# Altium PCB RadioFEM.PcbDoc
Units mil, origin at the board's own origin, x right, y up, seen from the top; angles counter-clockwise.
Board outline 1968.5 x 965 mil, 4 copper layers (Top Layer, Internal Plane 1, Signal Layer 1, Bottom Layer), stack 64.634 mil thick; 104 components, 61 nets, 283 pads, 243 vias.
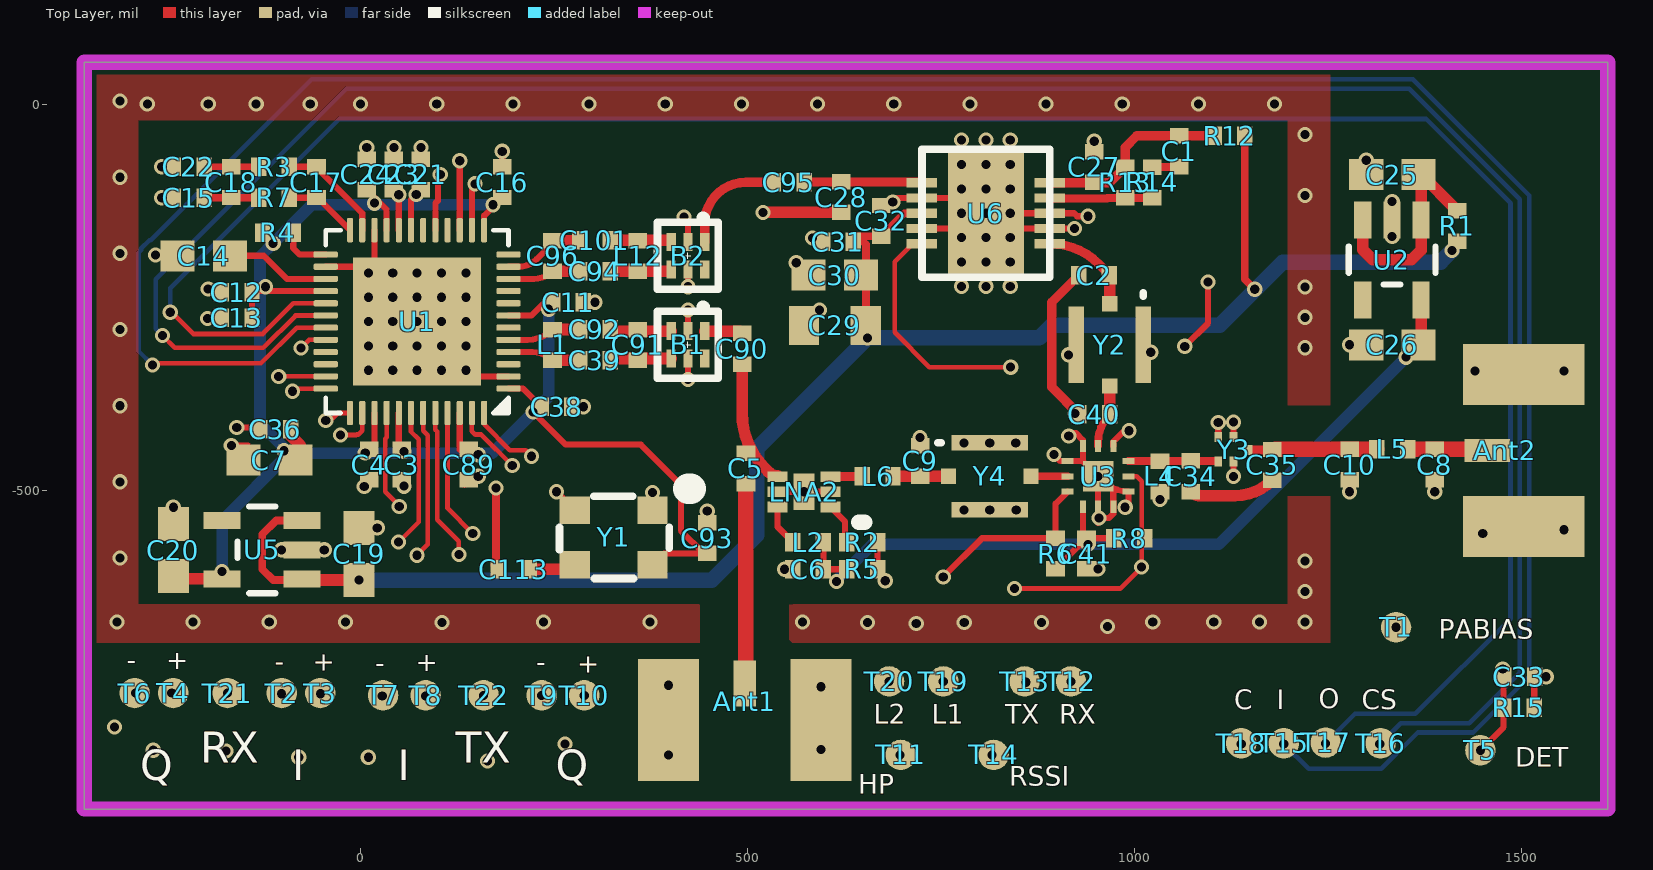
[diagram p0: Top Layer view]
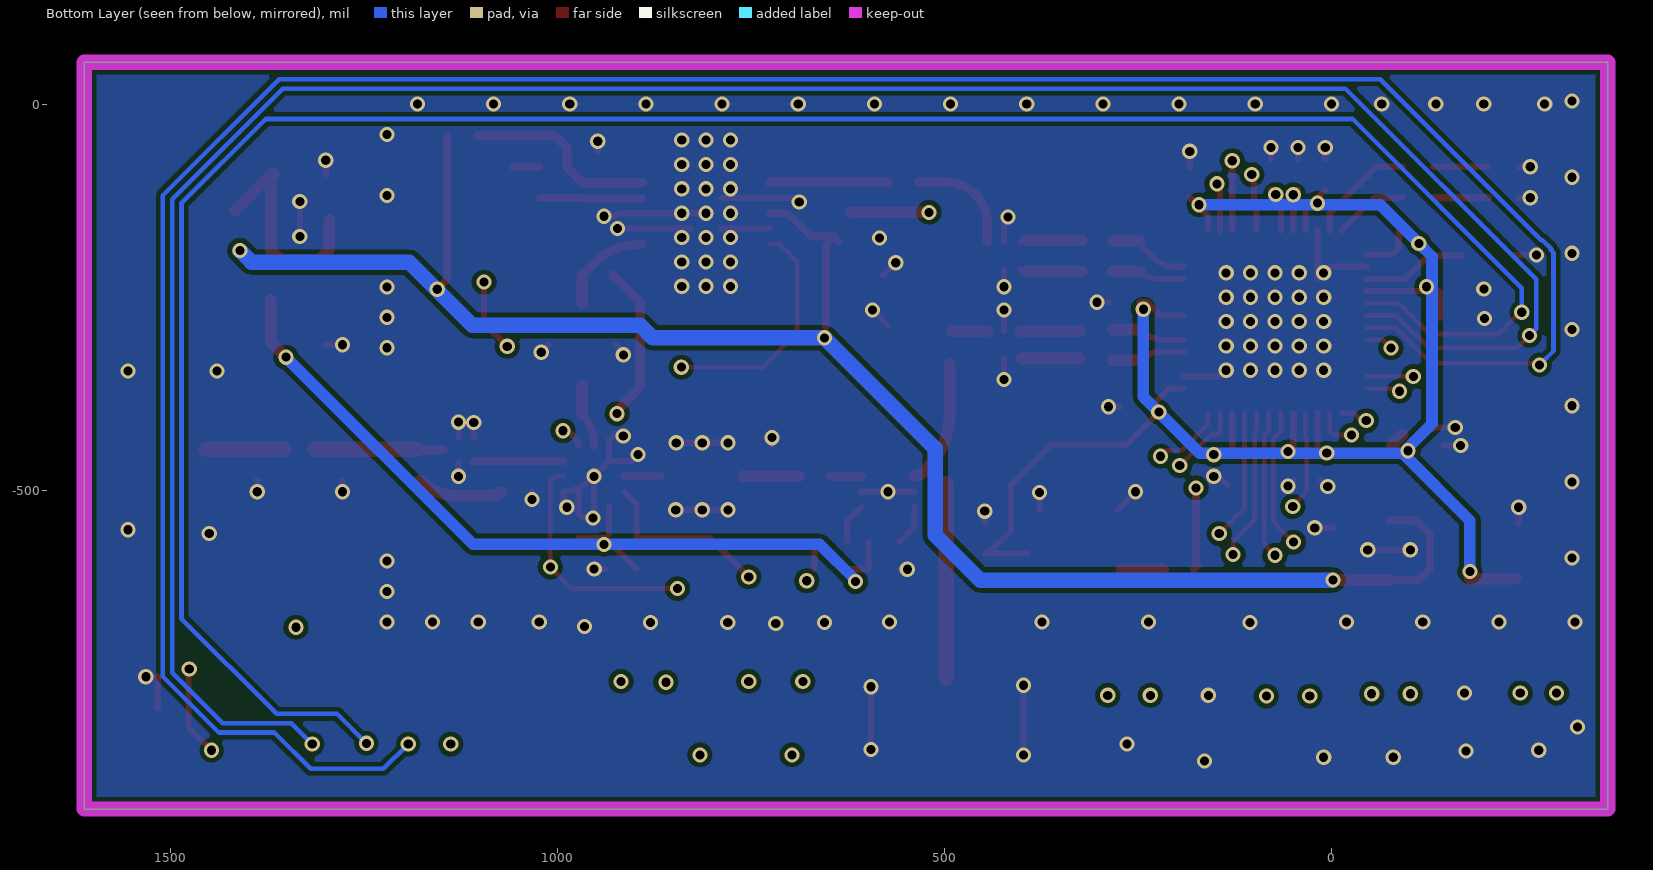
[diagram p1: Bottom Layer view, seen from below]
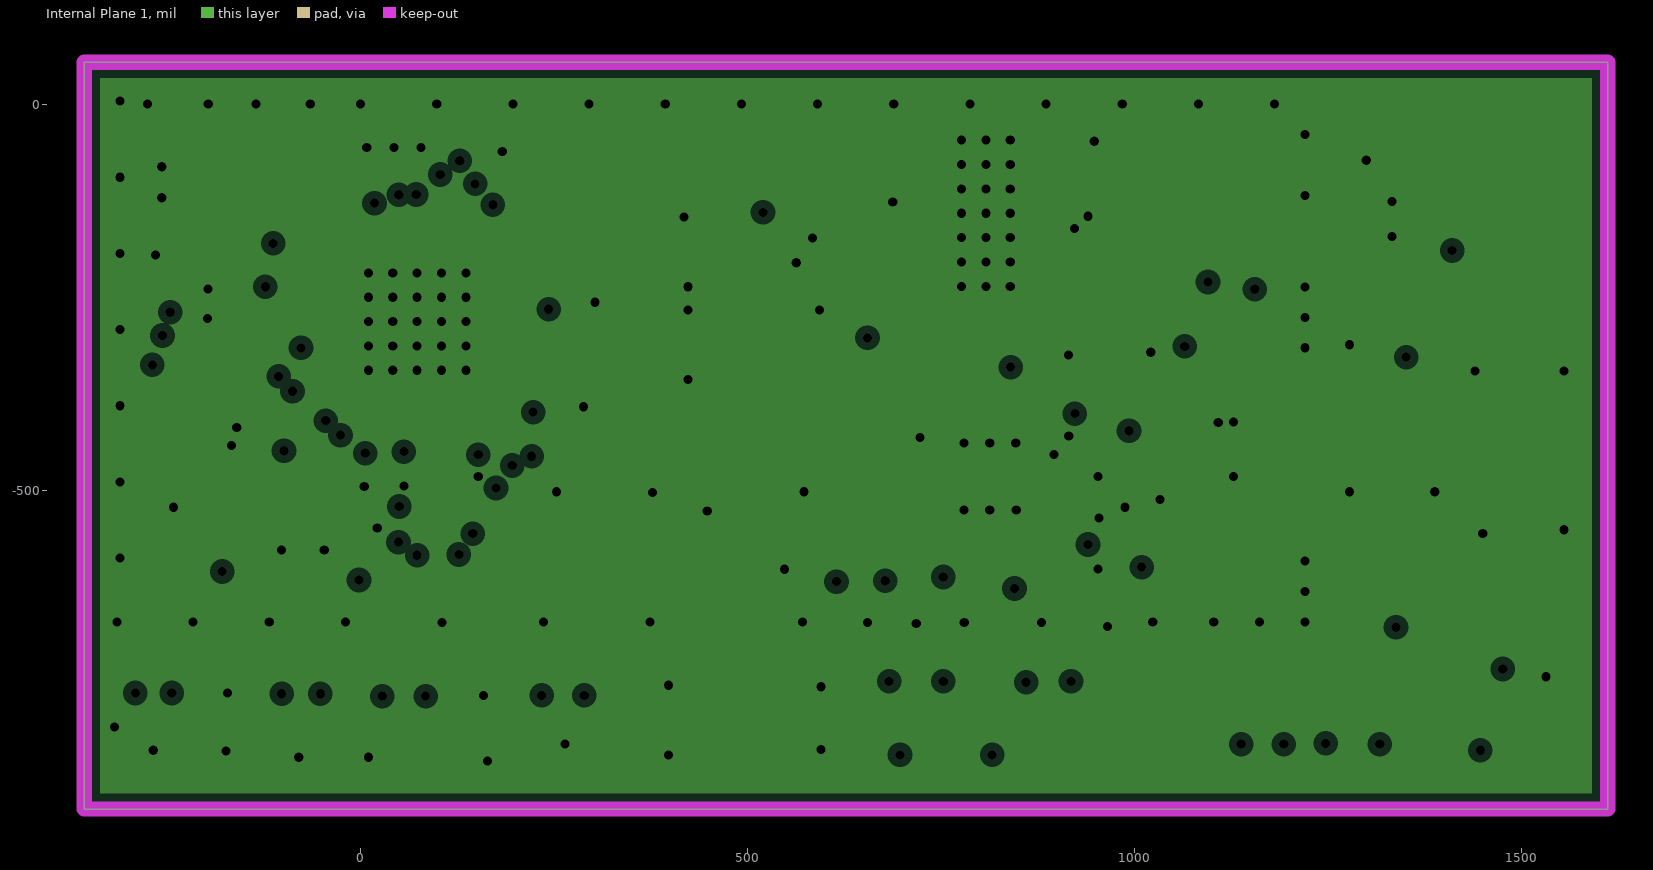
[diagram p2: Internal Plane 1, clearances drawn from the general rule]
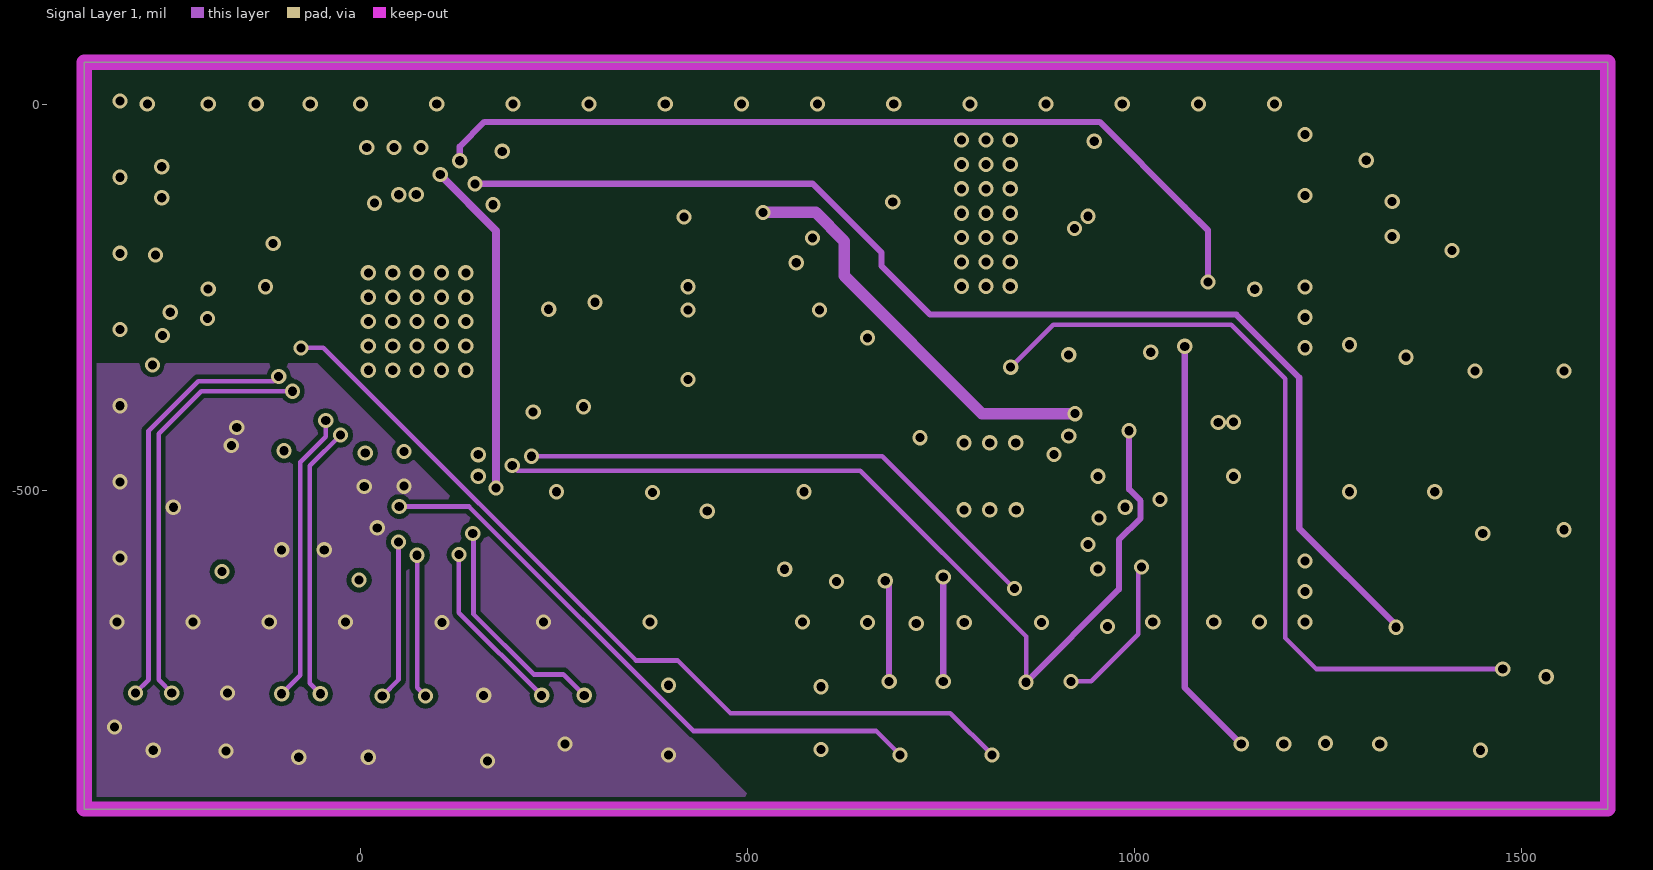
[diagram p3: Signal Layer 1]

## Layer stack, top to bottom
Top Solder: solder mask 0.4, Solder Resist, Dk 3.5
Top Layer: signal copper 1.4
Dielectric 1: core 6, FR-4, Dk 4.2
Internal Plane 1: plane copper 1.4169, net GND
Dielectric 3: prepreg 47, Dk 4.2
Signal Layer 1: signal copper 1.4169
Dielectric 2: core 6, Dk 4.2
Bottom Layer: signal copper 1.4
Bottom Solder: solder mask 0.4, Solder Resist, Dk 3.5

## Board outline
-357.02,-911.06 1611.48,-911.06 1611.48,53.94 -357.02,53.94

## Design rules (kind name [scope] priority, off if disabled: settings)
Clearance [All] p1: gap=6
DiffPairsRouting [All] p1: maxlimit=10 minlimit=10 mostfreqgap=10 toplayer_minwidth=6 toplayer_maxwidth=15 toplayer_prefwidth=15 midlayer1_minwidth=6 midlayer1_maxwidth=15 midlayer1_prefwidth=15 bottomlayer_minwidth=6 bottomlayer_maxwidth=15 bottomlayer_prefwidth=15 maxuncoupledlength=500
HoleToHoleClearance [All] p1: gap=6 allowstackedmicrovias=TRUE
MinimumSolderMaskSliver [All] p1 off: minsoldermaskwidth=10
PlaneClearance [All] p1: clearance=10
PlaneConnect [All] p1: planeconnectstyle=Direct reliefexpansion=20 reliefentries=4 reliefconductorwidth=10 reliefairgap=10
PolygonConnect [All] p1: connectstyle=Direct reliefconductorwidth=10 reliefentries=4 polygonreliefangle="90 Angle" airgapwidth=10
RoomDefinition power&interface [InComponentClass('power&interface')] p1 off: confinementstyle=ConfineIn formatcopy=TRUE lockcomponents=FALSE outline 1657.98,-851.06 4772.98,-851.06 4772.98,-691.06 1657.98,-691.06
RoomDefinition Radio [InComponentClass('Radio')] p2 off: confinementstyle=ConfineIn formatcopy=TRUE lockcomponents=FALSE outline 3687.98,-1721.06 11072.98,-1721.06 11072.98,-1321.06 3687.98,-1321.06
RoomDefinition FEM [InComponentClass('FEM')] p3 off: confinementstyle=ConfineIn formatcopy=TRUE lockcomponents=FALSE outline 3732.98,-181.06 6542.98,-181.06 6542.98,1538.94 3732.98,1538.94
RoutingVias [All] p1: holewidth=12 width=20 viastyle="Through Hole" minholewidth=12 minwidth=20 maxholewidth=28 maxwidth=50
SilkToBoardRegionClearance [All] p1 off:
SilkToSilkClearance [All] p1 off: silktosilkclearance=10
SilkToSolderMaskClearance [IsPad] p1 off: minsilkscreentomaskgap=10 clearancetoexposedcopper=TRUE
SolderMaskExpansion [All] p1: expansion=4
UnpouredPolygon [All] p1: allowunpoured=FALSE
Width [All] p1: maxlimit=60 minlimit=6 preferedwidth=6
21 further rules are at their usual default settings.

## Classes and differential pairs
component class power&interface: C19 C20 C25 C26 R1 T2 T3 T4 T5 T6 T7 T8 T9 T10 T11 T12 T13 T14 T15 T16 T17 T18 T19 T20 T21 T22 U2 U5
component class FEM: Ant1 Ant2 C1 C2 C5 C6 C8 C9 C10 C27 C28 C29 C30 C31 C32 C33 C34 C35 C40 C41 L2 L4 L5 L6 LNA2 R2 R5 R6 R8 R12 R13 R14 R15 U3 U6 Y2 Y3 Y4
component class Radio: B1 B2 C3 C4 C7 C11 C12 C13 C14 C15 C16 C17 C18 C21 C22 C23 C24 C36 C38 C39 C89 C90 C91 C92 C93 C94 C95 C96 C101 C113 L1 L12 R3 R4 R7 T1 U1 Y1

## Components (designator, comment, footprint, x,y, rotation, side; value= is the part's Value field where it differs from the comment)
Ant1 "Antenna" SMA-2 397.98,-796.06 r0 top
Ant2 "Antenna" SMA-2 1502.98,-546.06 r90 top
B1 "Balun" HHM1711D1/HHM1732B1 422.98,-311.06 r270 top
B2 "Balun" HHM1711D1/HHM1732B1 422.98,-196.06 r270 top
C1 "Cap" 0402 1057.98,-61.06 r90 top
C2 "NC/22p" 0402 947.98,-221.06 r180 top
C3 "10nF" 0402 52.98,-466.06 r90 top
C4 "10nF" 0402 10.98,-466.06 r90 top
C5 "NC/22p" 0402 497.98,-471.06 r90 top
C6 "Cap" 0402 577.98,-601.06 r0 top
C7 "4.7uF" 0603 -118.02,-460.06 r0 top
C8 "Cap" 0402 1387.98,-466.06 r90 top
C9 "Cap" 0402 722.98,-461.06 r270 top
C10 "Cap" 0402 1277.98,-466.06 r90 top
C11 "22pF" 0402 267.98,-256.06 r0 top
C12 "100pF" 0402 -160.02,-243.06 r180 top
C13 "0.1uF" 0402 -160.02,-276.06 r180 top
C14 "1uF" 0603 -203.02,-196.06 r0 top
C15 "NC" 0402 -222.02,-121.06 r180 top
C16 "10nF" 0402 182.98,-101.06 r90 top
C17 "180pF" 0402 -57.02,-101.06 r90 top
C18 "3300pF" 0402 -167.02,-101.06 r90 top
C19 "4.7uF" 0603 -2.02,-581.06 r270 top
C20 "4.7uF" 0603 -242.02,-576.06 r270 top
C21 "10nF" 0402 77.98,-91.06 r90 top
C22 "NC" 0402 -222.02,-81.06 r180 top
C23 "10nF" 0402 42.98,-91.06 r90 top
C24 "10nF" 0402 7.98,-91.06 r90 top
C25 "4.7uF" 0603 1332.98,-91.06 r0 top
C26 "4.7uF" 0603 1332.98,-311.06 r0 top
C27 "Cap" 0402 947.98,-81.06 r270 top
C28 "NC/22p" 0402 620.98,-120.06 r270 top
C29 "Cap" 0805 612.98,-286.06 r180 top
C30 "Cap" 0603 612.98,-221.06 r180 top
C31 "Cap" 0402 616.98,-178.06 r180 top
C32 "Cap" 0402 672.98,-151.06 r90 top
C33 "Cap" 0402 1496.98,-740.06 r0 top
C34 "NC/22p" 0402 1072.98,-481.06 r90 top
C35 "NC/22p" 0402 1177.98,-466.06 r270 top
C36 "10nF" 0402 -110.02,-420.06 r180 top
C38 "22pF" 0402 252.98,-391.06 r0 top
C39 "22pF" 0402 302.98,-331.06 r180 top
C40 "NC/22p" 0402 947.98,-401.06 r0 top
C41 "Cap" 0402 937.98,-581.06 r90 top
C89 "10nF" 0402 139.98,-466.06 r90 top
C90 "22pF" 0402 492.98,-316.06 r270 top
C91 "NC" 0402 357.98,-311.06 r270 top
C92 "22pF" 0402 302.98,-291.06 r180 top
C93 "0.1uF" 0402 447.98,-561.06 r90 top
C94 "3pF" 0402 302.98,-216.06 r180 top
C95 "22pF" 0402 552.98,-101.06 r0 top
C96 "NC" 0402 247.98,-196.06 r270 top
C101 "3pF" 0402 302.98,-176.06 r180 top
C113 "0R/0.1uF" 0402 197.98,-601.06 r180 top
L1 "6.2nH" 0402 247.98,-311.06 r270 top
L2 "Inductor" 0402 577.98,-566.06 r0 top
L4 "5.6nH" 0402 1032.98,-481.06 r270 top
L5 "Inductor" 0402 1332.98,-446.06 r0 top
L6 "Inductor" 0402 667.98,-481.06 r0 top
L12 "NC" 0402 357.98,-196.06 r270 top
LNA2 "SKY65405" SKY65404-31 572.98,-501.06 r180 top
R1 "FB" 0402 1417.32,-157.48 r270 top
R2 "Res2" 0402 647.98,-566.06 r0 top
R3 "475" 0402 -112.02,-81.06 r0 top
R4 "10k" 0402 -107.02,-166.06 r0 top
R5 "" 0402 647.98,-601.06 r0 top
R6 "" 0402 897.98,-581.06 r90 top
R7 "475" 0402 -112.02,-121.06 r0 top
R8 "NC" 0402 992.98,-561.06 r0 top
R12 "Res2" 0402 1122.98,-41.06 r180 top
R13 "Res2" 0402 987.98,-101.06 r270 top
R14 "Res2" 0402 1022.98,-101.06 r270 top
R15 "Res2" 0402 1496.98,-780.06 r180 top
T1 "PABIAS" "TestPad - 1mm" 1337.98,-676.06 r0 top
T2 "RXI-" "TestPad - 1mm" -102.02,-761.06 r0 top
T3 "RXI-" "TestPad - 1mm" -52.02,-761.06 r0 top
T4 "RXI-" "TestPad - 1mm" -242.02,-761.06 r180 top
T5 "DET" "TestPad - 1mm" 1446.98,-835.06 r90 top
T6 "RXI-" "TestPad - 1mm" -292.02,-761.06 r180 top
T7 "RXI-" "TestPad - 1mm" 28.98,-764.06 r0 top
T8 "RXI-" "TestPad - 1mm" 83.98,-764.06 r0 top
T9 "RXI-" "TestPad - 1mm" 233.98,-764.06 r0 top
T10 "RXI-" "TestPad - 1mm" 288.98,-764.06 r90 top
T11 "HP" "TestPad - 1mm" 697.98,-841.06 r90 top
T12 "RX" "TestPad - 1mm" 917.98,-746.06 r90 top
T13 "TX" "TestPad - 1mm" 857.98,-746.06 r90 top
T14 "RSSI" "TestPad - 1mm" 817.98,-841.06 r90 top
T15 "I" "TestPad - 1mm" 1192.98,-826.06 r90 top
T16 "CS" "TestPad - 1mm" 1317.98,-826.06 r90 top
T17 "O" "TestPad - 1mm" 1246.98,-825.06 r90 top
T18 "C" "TestPad - 1mm" 1137.98,-826.06 r90 top
T19 "L1" "TestPad - 1mm" 752.98,-746.06 r270 top
T20 "L2" "TestPad - 1mm" 682.98,-746.06 r270 top
T21 "VDET" "TestPad - 1mm" -172.02,-761.06 r180 top
T22 "VDET" "TestPad - 1mm" 158.98,-764.06 r90 top
U1 "MAX2837" MAX2837 72.98,-281.06 r90 top
U2 "RT9013-33GB" SOT23-5 1332.98,-201.06 r180 top
U3 "SKY85203" SKY85203 952.98,-481.06 r270 top
U5 "RT9013-33GB" SOT23-5 -127.02,-576.06 r90 top
U6 "Sky65174-21" SKY65174-21 807.98,-141.06 r0 top
Y1 "OSC_40M" TXC_7Q 326.98,-560.06 r180 top
Y2 "2450BP39C100A" 2450BP39C100A 967.98,-311.06 r270 top
Y3 "2450BP08A0100" 2450BP08A0100 1127.98,-446.06 r180 top
Y4 "2450BP39C100A" 2450BP39C100A 812.98,-481.06 r0 top

## Footprints (in the part's own frame and the unit in brackets; to place one, negate y for a bottom-side part, rotate by r counter-clockwise, add the part's x,y. Pads: shape width x height; smd on the part's side, far side on the other; paste and mask are expansions set on the pad)
0402 [mil] "0402-RES"
  rect 20x24 smd: 1(-19.69,0) 2(20,0)
0603 [mil] "0603-RES"
  rect 44x40 smd: 1(-33.46,0) 2(34,0)
0805 [mil]
  rect 39.37x50 smd: 1(-40,0) 2(40,0)
  body extent -50,-30 50,30, height 31
2450BP08A0100 [mm]
  rect 0.25x0.325 smd: 1(-0.5,0.025) 2(0,-0.4) 3(0.5,-0.4) 4(0.5,0.4) 5(0,0.4)
  body extent -0.75,-0.55 0.75,0.55, height 0.5
2450BP39C100A [mm]
  rect 2.5x0.5 smd: 1(0,-1.1) 3(0,1.1)
  rect 0.5x0.5 smd: 2(1.35,0) 4(-1.35,0)
  silkscreen extent -1.7,1.1 -1.6,1.1, body extent -1.25,-1 1.25,1, height 0.9
HHM1711D1/HHM1732B1 [mm]
  rect 0.6x0.3 smd: 1(-0.45,0.55) 2(-0.45,0) 3(-0.45,-0.55) 4(0.45,-0.55) 5(0.45,0) 6(0.45,0.55)
  silkscreen extent -1.32,-1 1.1,1
MAX2837 [mm]
  rect 4.2x4.2 smd: 0(0,0)
  rrect50% 0.2x0.8 smd: 1(-2.2,-3) 2(-1.8,-3) 3(-1.4,-3) 4(-1,-3) 5(-0.6,-3) 6(-0.2,-3) 7(0.2,-3) 8(0.6,-3) 9(1,-3) 10(1.4,-3) 11(1.8,-3) 12(2.2,-3) 25(2.2,3) 26(1.8,3) 27(1.4,3) 28(1,3) 29(0.6,3) 30(0.2,3) 31(-0.2,3) 32(-0.6,3) 33(-1,3) 34(-1.4,3) 35(-1.8,3) 36(-2.2,3)
  rrect50% 0.8x0.2 smd: 13(3,-2.2) 14(3,-1.8) 15(3,-1.4) 16(3,-1) 17(3,-0.6) 18(3,-0.2) 19(3,0.2) 20(3,0.6) 21(3,1) 22(3,1.4) 23(3,1.8) 24(3,2.2) 37(-3,2.2) 38(-3,1.8) 39(-3,1.4) 40(-3,1) 41(-3,0.6) 42(-3,0.2) 43(-3,-0.2) 44(-3,-0.6) 45(-3,-1) 46(-3,-1.4) 47(-3,-1.8) 48(-3,-2.2)
  silkscreen extent -3,-3 3,3, body extent -3,-3 3,3, height 0.75
SKY65174-21 [mm]
  rect 2.5x4.4 smd: 0(0,0)
  rect 1x0.3 smd: 1(-2.1,1) 2(-2.1,0.5) 3(-2.1,0) 4(-2.1,-0.5) 5(-2.1,-1) 6(2.1,-1) 7(2.1,-0.5) 8(2.1,0) 9(2.1,0.5) 10(2.1,1)
  silkscreen extent -2.1,-2.1 2.1,2.1
SKY65404-31 [mm]
  rect 0.7x1.2 smd: 0(0,0)
  rect 0.65x0.35 smd: 1(-0.87,0.5) 2(-0.87,0) 3(-0.87,-0.5) 4(0.87,-0.5) 5(0.87,0) 6(0.87,0.5)
  silkscreen extent -2,1 -1.8,1, body extent -0.75,-0.75 0.75,0.75, height 0.45
SKY85203 [mm]
  rect 1x1 smd: 0(0,0)
  rect 0.4x0.2 smd: 1(-1,0.5) 2(-1,0) 3(-1,-0.5) 7(1,-0.5) 8(1,0) 9(1,0.5)
  rect 0.2x0.4 smd: 4(-0.5,-1) 5(0,-1) 6(0.5,-1) 10(0.5,1) 11(0,1) 12(-0.5,1)
SMA-2 [mm]
  rect 0.75x1.5 smd: 1(2.5,1.2)
  rect 2x4 smd: GND(0,0) GND(5,0)
SOT23-5 [mil] "SOT23-5"
  rect 22x48 smd: 1(-37.4,-51.19) 2(0,-51.19) 3(38,-51.19) 4(38,52) 5(-37.4,52)
  silkscreen extent -56,-17 56,32
"TestPad - 1mm" [mm]
  round 1 smd: 1(0,0)
TXC_7Q [mm]
  rect 1x0.9 smd: 1(-1.275,-0.9) 2(1.275,-0.9) 3(1.275,0.9) 4(-1.275,0.9)
  silkscreen extent -2.52,-1.6 1.78,1.35

## Part data
C1 C6 C8 C9 C10 C27 C29 C30 C31 C32 C33 C41: "Capacitor"
C2 C5 C7 C14 C19 C20 C25 C26 C28 C34 C35 C40: library part Cap, "Capacitor"
C3 C4 C11 C12 C13 C15 C16 C17 C18 C21 C22 C23 C24 C36 C38 C39 C89 C90 C91 C92 C93 C94 C95 C96 C101 C113: library part CAP0402-CAP, "<b>Capacitor</b> / Standard 0603 ceramic capacitor, and 0.1\" leaded capacitor."
L1 L4 L12: library part Inductor, "Inductor"
LNA2: library part SKY65404-31
R1 R3 R4 R5 R6 R7 R8: library part Res2, "Resistor"
R2 R12 R13 R14 R15: "Resistor"
T1 T2 T3 T4 T5 T6 T7 T8 T9 T10 T11 T12 T13 T14 T15 T16 T17 T18 T19 T20 T21 T22: library part TestPad
U2 U5: library part LP5907

## Via types
v1: diameter 19.68, hole 11.81, Top Layer to Bottom Layer, 243 vias

## Nets (pads, with @x,y where several pads share a name; then routed paths per layer and width w, separated by ;. In a path a pad name is that pad's centre, name@x,y a point inside that pad or via, vN(x,y) a via of type N, cw(c..) or ccw(c..) an arc to the next point about the centre after c; other vN are vias at no path point)
3.3LNA: C6.2 C26.2 C41.2 L2.2 R5.1 R6.1 R8.1 U2.5 U3.7 | length 1127.5
  Top Layer w8: L2.2 C6.2 R5.1 ; R6.1 937.66,-561.06 C41.2 R8.1 ; C41.2@933.29,-556.38 U3.7
  Top Layer w15: v1(1350.98,-327.06) C26.2 ; C26.2@1370.38,-307.66 U2.5
  Bottom Layer w15: v1(614.98,-617.06) 614.98,-615.06 660.98,-569.06 v1(939.98,-569.06) 1108.98,-569.06 v1(1350.98,-327.06)
3.3RF: C3.2 C4.2 C7.2 C11.1 C12.1 C13.1 C16.1 C20.2 C21.1 C23.1 C24.1 C36.1 C38.1 C89.2 C93.1 R4.1 U1.1 U1.7 U1.13 U1.19 U1.20 U1.21 U1.28 U1.39 U1.41 U1.46 U5.5 Y1.4 | length 2376.3
  Top Layer w8: C13.1 C12.1 ; C12.1@-138.97,-241.69 U1.28 ; C24.1 33.61,-136.38 U1.21 ; C4.2@17.86,-441.18 U1.39 ; C23.1 v1(49.35,-117.13) U1.20 ; C3.2@49.35,-444.69 U1.41 ; C3.2 v1(55.98,-449.06) ; U1.19 65.1,-123.62 v1(71.82,-116.91) C21.1 ; C89.2@127.98,-446.06 134.98,-453.06 v1(151.98,-453.06) ; C89.2@128.09,-445.94 U1.46 ; U1.13 159.59,-144.13 C16.1 ; U1.1 209.91,-367.68 C38.1 ; U1.7 220.85,-273.19 237.98,-256.06 C11.1 ; v1(222.98,-398.06) 264.98,-440.06 361.98,-440.06 413.98,-492.06 413.98,-551.06 C93.1@443.66,-580.75 ; Y1.4@391.92,-580.75 C93.1@443.66,-580.75 ; C93.1 C93.1@443.66,-580.75
  Top Layer w15: C20.2@-238.62,-613.47 U5.5 v1(-179.02,-604.06) ; v1@-113.02,-181.06 v1(-113.02,-180.06) ; C36.1@-92.34,-426.75 C7.2@-78.02,-441.06 ; v1@16.98,-129.06 v1(17.98,-128.06)
  Bottom Layer w15: v1(-179.02,-604.06) -179.02,-538.06 -92.02,-451.06 v1(5.98,-451.06) 169.98,-451.06 v1(222.98,-398.06) 242.98,-378.06 v1(242.98,-265.06) ; v1(-99.02,-448.06) -99.02,-444.06 -130.02,-413.06 -130.02,-197.06 v1(-113.02,-180.06) -63.02,-130.06 15.98,-130.06 v1@16.98,-129.06 ; v1(17.98,-128.06) v1@16.98,-129.06 ; v1(170.98,-130.06) 17.98,-130.06 v1@16.98,-129.06
  other v1: -123.02,-236.06
5V: C19.2 C29.1 C30.1 C31.1 C32.1 R1.2 R12.1 U5.1 U5.3 U6.3 | length 2316.1
  Top Layer w10: U5.3 -109.02,-538.06 -127.02,-556.06 -127.02,-601.06 -113.02,-615.06 U5.1@-74.24,-615.06 ; C31.1 643.98,-170.75 C32.1 702.66,-141.06 U6.3 ; C31.1@642.35,-170.75 652.98,-181.38 C29.1 ; R12.1 1142.66,-226.48 v1(1155.47,-239.29)
  Top Layer w15: U5.1@-74.24,-615.06 v1(-2.02,-615.06)
  Bottom Layer w20: v1(-2.02,-615.06) 453.98,-615.06 511.98,-557.06 511.98,-445.06 v1(654.98,-302.06) 876.98,-302.06 892.98,-286.06 1109.98,-286.06 1191.75,-204.29 1395.47,-204.29 v1(1410.47,-189.29)
CLOCK40M: C113.2 U1.17 | length 613
  Top Layer w8: U1.17 96.6,-128.27 99.98,-124.89 v1@99.98,-94.06
  Top Layer w10: v1(174.98,-496.06) 174.98,-594.06 172.98,-596.06 C113.2
  Signal Layer 1 w10: v1(102.98,-91.06) 102.98,-91.54 174.98,-163.54 v1(174.98,-496.06)
GND: Ant1.GND Ant2.GND B1.2 B1.5 B2.2 B2.5 C3.1 C4.1 C6.1 C7.1 C8.1 C9.1 C10.1 C11.2 C12.2 C13.2 C14.1 C15.2 C16.2 C19.1 C20.1 C21.2 C22.2 C23.2 C24.2 C25.1 C26.1 C27.1 C29.2 C30.2 C31.2 C32.2 C33.2 C36.2 C38.2 C41.1 C89.1 C93.2 L4.2 LNA2.0 LNA2.2 LNA2.5 R15.1 T21.1 T22.1 U1.0 U1.2 U1.22 U1.26 U2.2 U3.0 U3.3 U3.4 U3.8 U3.9 U3.10 U5.2 U6.0 U6.2 U6.4 U6.7 U6.8 Y1.1 Y1.2 Y2.1 Y2.3 Y3.2 Y3.3 Y3.5 Y4.1 Y4.3 | length 2146.2
  Top Layer w8: v1(-265,-195) -237.55,-195 C14.1 ; v1(-257.02,-121.06) C15.2 ; v1(-257.02,-81.06) C22.2 ; C20.1 v1(-242.02,-521.06) ; v1(-167.02,-441.06) C7.1@-145.49,-441.06 ; v1(-160.02,-418.06) -132.02,-418.06 C36.2 ; v1(-102.02,-576.06) U5.2 v1(-47.02,-576.06) ; U1.26 U1.0@2.11,-210.2 ; C19.1 v1(21.44,-547.6) ; v1(4.66,-494.06) C4.1@12.98,-485.75 ; C24.2 v1(7.98,-56.06) ; U1.0@17.86,-225.94 U1.22 ; C23.2 v1(42.98,-56.06) ; C3.1@47.98,-485.75 v1(55.98,-493.75) ; C21.2 v1(77.98,-56.06) ; C89.1@134.29,-492.06 145.29,-481.06 v1(151.98,-481.06) ; U1.0@143.84,-351.93 U1.2 ; C16.2 v1(182.98,-61.06) ; v1(253.21,-501.06) Y1.2 ; C38.2 v1(287.98,-391.06) ; C11.2 v1(302.98,-256.06) ; Y1.1 v1(377.17,-501.87) ; v1(397.98,-841.06) 397.98,-796.06 v1(397.98,-751.06) ; v1(417.98,-146.06) 422.98,-146.06 B2.2 ; v1(422.98,-356.06) B1.5 ; B1.2 v1(422.98,-266.06) ; v1(422.98,-236.06) B2.5 ; C93.2 v1(447.98,-526.06) ; LNA2.5 v1(572.98,-501.06) LNA2.2 LNA2.2@607.23,-503.06 ; v1(547.98,-601.06) C6.1 ; v1(562.98,-205.06) C30.2 ; C29.2 v1(592.98,-266.06) ; v1(583.98,-173.06) C31.2@590.98,-173.06 ; v1(594.83,-834.21) 594.83,-796.06 v1(594.83,-752.91) ; v1(687.66,-126.59) 688.29,-125.96 688.29,-121.38 U6.2 U6.0@788.29,-121.38 ; C9.1 v1(722.98,-431.06) ; U6.4 U6.0@788.29,-160.75 ; v1(779.67,-524.37) v1(812.98,-524.37) v1(847.28,-524.37) ; v1(779.67,-437.76) v1(812.98,-437.76) v1(846.67,-437.76) ; v1(807.98,-141.06) v1(839.47,-141.06) U6.8 921.98,-141.06 925.91,-145 v1(940,-145) ; U6.0@827.66,-160.75 U6.7 v1(922.66,-160.75) ; v1(896,-453) 904.38,-461.38 U3.4 U3.0@933.29,-461.38 ; v1(915,-429) 915,-425 924,-425 933.29,-434.29 U3.3 U3.0@933.29,-461.38 ; v1(914.98,-324.06) 912.28,-324.06 911.98,-323.76 Y2.1 ; C41.1 v1(952.66,-600.75) ; C27.1 v1(947.98,-48.06) ; v1@952.98,-540.98 v1@952.98,-535 ; U3.0@958.74,-486.83 ccw(c992.35,-453.22) U3.10 992.35,-520.43 988.61,-520.43 v1(987.98,-521.06) ; U3.0@972.66,-500.75 U3.9 972.66,-529.34 967,-535 v1(954,-535) v1@952.98,-535 ; Y2.3 v1(1020.98,-320.76) ; v1(1032.98,-511.06) L4.2 ; Y3.3 v1(1108.29,-411.38) ; v1(1127.98,-481.06) Y3.5 ; Y3.2 v1(1127.98,-411.06) ; v1(1277.98,-501.06) C10.1 ; v1(1277.98,-311.06) C26.1 ; C25.1 v1(1299.51,-72.6) ; v1(1332.98,-171.06) U2.2 v1(1332.98,-126.06) ; v1(1387.98,-501.06) C8.1 ; R15.1 C33.2@1516.66,-740.38 ; C33.2 v1(1531.98,-740.06) ; U3.0@933.29,-461.38 v1(952.98,-481.06) U3.8 v1@952.98,-535
  Signal Layer 1 w8: v1(687.66,-126.59) v1@687.66,-121.38
  other v1: 164,-849 -80,-844 10,-844 -174,-836 -268,-835 264,-827 -318,-805 158.98,-764.06 -172.02,-761.06 965,-675 717.98,-671.06 105,-670 655,-670 780,-670 880,-670 -314.96,-669.29 -216.54,-669.29 -118.11,-669.29 -19.69,-669.29 236.22,-669.29 374.02,-669.29 570.87,-669.29 1023.62,-669.29 1102.36,-669.29 1161.42,-669.29 1220.47,-669.29 1220.47,-629.92 1220.47,-590.55 -311.02,-586.61 1450,-555 1555,-550 -311.02,-488.19 -311.02,-389.76 1440,-345 1555,-345 9.98,-344.06 41.48,-344.06 72.98,-344.06 104.47,-344.06 135.97,-344.06 1220.47,-314.96 9.98,-312.56 41.48,-312.56 72.98,-312.56 104.47,-312.56 135.97,-312.56 -311.02,-291.34 9.98,-281.06 41.48,-281.06 72.98,-281.06 104.47,-281.06 135.97,-281.06 -198.02,-277.06 1220.47,-275.59 9.98,-249.57 41.48,-249.57 72.98,-249.57 104.47,-249.57 135.97,-249.57 -197.02,-239.06 1220.47,-236.22 776.48,-235.55 807.98,-235.55 839.47,-235.55 9.98,-218.07 41.48,-218.07 72.98,-218.07 104.47,-218.07 135.97,-218.07 776.48,-204.06 807.98,-204.06 839.47,-204.06 -311.02,-192.91 776.48,-172.56 807.98,-172.56 839.47,-172.56 776.48,-141.06 1220.47,-118.11 776.48,-109.57 807.98,-109.57 839.47,-109.57 -311.02,-94.49 776.48,-78.07 807.98,-78.07 839.47,-78.07 776.48,-46.57 807.98,-46.57 839.47,-46.57 1220.47,-39.37 -275.59,0 -196.85,0 -135,0 -65,0 0,0 98.43,0 196.85,0 295.28,0 393.7,0 492.13,0 590.55,0 688.98,0 787.4,0 885.83,0 984.25,0 1082.68,0 1181.1,0 -311.02,3.94
NetAnt1_1: Ant1.1 C5.1 | length 251.5
  Top Layer w20: Ant1.1@497.98,-742.24 C5.1
NetAnt2_1: Ant2.1 C8.2 L5.2 | length 101.2
  Top Layer w20: L5.2 C8.2 Ant2.1@1454.16,-446.06
NetB1_1: B1.1 C90.1 | length 45.3
  Top Layer w15: B1.1 C90.1@489.94,-293.35
NetB1_3: B1.3 C91.1 C92.1 | length 76.4
  Top Layer w15: C92.1@324.94,-293.35 B1.3
NetB1_4: B1.4 C39.1 C91.2 | length 76.4
  Top Layer w15: C39.1@324.94,-328.78 B1.4
NetB2_1: B2.1 C95.1 | length 143
  Top Layer w12: B2.1 444.63,-154.41 cw(c497.98,-154.41) 497.98,-101.06 C95.1
NetB2_3: B2.3 C101.1 L12.1 | length 79.3
  Top Layer w8: B2.3@395.81,-176.06 cw(c395.81,-183.86) B2.3
  Top Layer w15: C101.1 B2.3@395.81,-176.06
NetB2_4: B2.4 C94.1 L12.2 | length 79.3
  Top Layer w8: B2.4@395.81,-216.06 ccw(c395.81,-208.27) B2.4
  Top Layer w15: C94.1 L12.2 B2.4@395.81,-216.06
NetC1_1: C1.1 R14.1 | length 34.4
  Top Layer w10: R14.1 C1.1@1057.35,-81.38
NetC1_2: C1.2 C27.2 R12.2 R13.1 U6.10 | length 252.3
  Top Layer w12: U6.10 967.66,-101.69 R13.1 987.98,-56.06 1002.98,-41.06 C1.2 R12.2
NetC2_1: C2.1 U6.6 Y2.4 | length 127.3
  Top Layer w12: U6.6 cw(c890.65,-269.78) 953.83,-206.6 C2.1@967.98,-220.75
  Top Layer w15: Y2.4 C2.1@967.98,-220.75
NetC2_2: C2.2 C28.2 C40.1 | length 847.2
  Top Layer w12: C2.2 892.98,-256.06 892.98,-365.75 C40.1
  Top Layer w15: v1(520,-140) 620.91,-140 C28.2
  Signal Layer 1 w15: v1(520,-140) 587.91,-140 624.98,-177.06 624.98,-222.06 802.98,-400.06 v1(922.98,-400.06)
NetC5_2: C5.2 C90.2 LNA2.4 | length 162.2
  Top Layer w15: C90.2 492.98,-399.64 ccw(c592.98,-399.64) 522.27,-470.35 528.25,-476.33 ccw(c538.72,-465.86) LNA2.4@538.72,-480.67
NetC9_2: C9.2 L6.2 Y4.4 | length 71.9
  Top Layer w15: L6.2 C9.2 Y4.4
NetC10_2: C10.2 C35.1 L5.1 Y3.1 | length 160.9
  Top Layer w12: Y3.1 C35.1@1177.31,-447.05
  Top Layer w20: C35.1@1182,-446.06 C10.2 L5.1
NetC14_2: C14.2 U1.27 | length 136.3
  Top Layer w8: C14.2 -125.09,-196.06 -113.09,-208.06 -113.02,-208.06 -95.14,-225.94 U1.27
NetC15_1: C15.1 C18.1 R7.1 | length 70.6
  Top Layer w10: C15.1 R7.1
NetC17_1: C17.1 R7.2 U1.24 | length 95.7
  Top Layer w8: R7.2 -55.53,-121.06 U1.24
NetC17_2: C17.2 R3.2 U1.23 | length 140.9
  Top Layer w8: R3.2 -57.85,-81.06 2.11,-141.02 U1.23
NetC18_2: C18.2 C22.1 R3.1 | length 70.6
  Top Layer w8: C22.1 C18.2 R3.1
NetC25_2: C25.2 R1.1 U2.1 U2.3 | length 285.1
  Top Layer w15: U2.3 1294.98,-188.06 1307.98,-201.06 1357.98,-201.06 1370.38,-188.66 U2.1 C25.2@1370.38,-94.47 ; C25.2 C25.2@1366.98,-90.38 ; C25.2@1370.59,-91.06 R1.1
NetC28_1: C28.1 C95.2 U6.1 | length 153.2
  Top Layer w12: C95.2 572.98,-100.75 672.98,-100.75 724.35,-100.75 cw(c724.35,-101.69) U6.1
NetC33_1: C33.1 R15.2 T5.1 U6.5 | length 1451.1
  Top Layer w6: U6.5 713.61,-180.43 690,-204.04 690,-295 735,-340 v1(840,-340)
  Top Layer w8: v1(1446.98,-835.06) 1476.98,-805.06 R15.2 C33.1@1476.98,-740.38
  Signal Layer 1 w6: v1(840,-340) 894.94,-285.06 1125.04,-285.06 1195,-355.02 1195,-690 1235.06,-730.06 v1(1475.98,-730.06)
NetC34_1: C34.1 C35.2 | length 111.8
  Top Layer w15: C34.1 ccw(c1085.81,-487.92) 1085.81,-506.06 1129.69,-506.06 ccw(c1129.69,-437.78) C35.2
NetC34_2: C34.2 L4.1 U3.12 Y3.4 | length 116.1
  Top Layer w10: U3.12 L4.1 1107.25,-461.38 cw(c1107.25,-462.86) Y3.4
NetC39_2: C39.2 L1.2 U1.4 | length 94.7
  Top Layer w8: U1.4 222.31,-320.43 cw(c222.31,-356.73) L1.2
  Top Layer w15: L1.2 C39.2
NetC40_2: C40.2 U3.2 Y2.2 | length 81.5
  Top Layer w10: U3.2 952.98,-437.28 cw(c1004.19,-437.28) C40.2
  Top Layer w15: C40.2 Y2.2
NetC92_2: C92.2 L1.1 U1.5 | length 95.1
  Top Layer w8: U1.5 215.85,-304.69 ccw(c215.85,-259.25) L1.1
  Top Layer w15: L1.1 C92.2@282.66,-291.38
NetC94_2: C94.2 C96.2 U1.10 | length 94.5
  Top Layer w8: U1.10 224.12,-225.94 ccw(c224.12,-192.21) C96.2
  Top Layer w15: C96.2 C94.2
NetC96_1: C96.1 C101.2 U1.11 | length 105.9
  Top Layer w8: U1.11 203.98,-210.2 ccw(c203.98,-177.06) 227.41,-200.49 245.47,-182.43 ccw(c239.42,-176.38) C96.1
  Top Layer w15: C96.1 C101.2@282.66,-176.38
NetC113_1: C113.1 Y1.3 | length 53.6
  Top Layer w15: C113.1 Y1.3@271.21,-601.06
NetL2_1: L2.1 LNA2.6 | length 53.4
  Top Layer w8: LNA2.6 538.72,-546.5 L2.1
NetL6_1: L6.1 LNA2.3 | length 40.7
  Top Layer w12: LNA2.3 L6.1@647.98,-481.38
NetLNA2_1: LNA2.1 R2.1 | length 50.8
  Top Layer w8: LNA2.1 625.98,-539.5 R2.1@625.98,-563.75
NetR2_2: R2.2 R5.2 T20.1 | length 167.1
  Top Layer w8: R5.2 R2.2
  Signal Layer 1 w8: v1(677.98,-616.06) 682.98,-621.06 v1(682.98,-746.06)
NetR4_2: R4.2 U1.25 | length 65.4
  Top Layer w8: R4.2 -87.02,-186.06 -78.64,-194.45 U1.25
NetR6_2: R6.2 T19.1 U3.6 | length 367.5
  Top Layer w8: v1(752.98,-611.06) 802.98,-561.06 R6.2 897.98,-516.38 U3.6
  Signal Layer 1 w8: v1(752.98,-746.06) v1(752.98,-611.06)
NetR8_2: R8.2 T12.1 U1.48 U3.11 | length 1295
  Top Layer w6: U1.48 159.59,-413.98 192.83,-447.21 213.13,-447.21 v1(220.98,-455.06) ; v1(844.98,-626.06) 981.46,-626.06 v1(1009.22,-598.31) 1009.22,-487.31 1002.98,-481.06 U3.11
  Signal Layer 1 w6: v1(220.98,-455.06) 673.98,-455.06 v1(844.98,-626.06) ; v1(917.98,-746.06) 943.94,-746.06 1004.78,-685.22 1004.78,-677.1 1004.78,-602.75 v1(1009.22,-598.31)
NetR13_2: R13.2 R14.2 U6.9 | length 133
  Top Layer w10: U6.9 890.65,-122.06 964.53,-122.06 965.22,-121.38 R14.2@1022.66,-121.38
NetT1_1: T1.1 U1.14 | length 1616.4
  Top Layer w8: U1.14 143.84,-103.2 147.84,-103.2 v1(147.98,-103.06)
  Signal Layer 1 w8: v1@147.98,-101.06 v1(147.98,-103.06) 583.98,-103.06 673.13,-192.22 673.13,-209.28 735.91,-272.06 1131.59,-272.06 1212.98,-353.45 1212.98,-548.45 v1@1337.98,-673.45
  other v1: 1337.98,-676.06
NetT2_1: T2.1 U1.37 | length 415.6
  Top Layer w6: v1(-102.02,-762.06) T2.1 ; v1(-45.02,-409.06) -42.02,-412.06 -29.13,-399.17 U1.37
  Signal Layer 1 w6: v1(-102.02,-762.06) -77.87,-737.91 -77.87,-462.59 -45.02,-429.75 v1(-45.02,-409.06)
NetT3_1: T3.1 U1.38 | length 411.8
  Top Layer w6: v1(-52.02,-762.06) T3.1 ; v1(-26.03,-427.72) -5.41,-427.72 -4.75,-427.06 -3.02,-427.06 2.11,-421.93 U1.38
  Signal Layer 1 w6: v1(-52.02,-762.06) -65.87,-748.22 -65.87,-467.56 v1(-26.03,-427.72) v1@-25.37,-427.06
NetT4_1: T4.1 U1.36 | length 586.1
  Top Layer w6: v1(-88.02,-371.06) -88.02,-368.06 -88.41,-367.68 U1.36
  Signal Layer 1 w6: v1(-244.02,-761.06) -261.02,-744.06 -261.02,-426.03 -206.05,-371.06 v1(-88.02,-371.06) v1@-89.02,-370.06
NetT6_1: T6.1 U1.35 | length 604
  Top Layer w6: v1(-105.89,-351.93) U1.35
  Signal Layer 1 w6: v1(-291.02,-761.06) -274.02,-744.06 -274.02,-422.06 -210.02,-358.06 -112.02,-358.06 v1(-105.89,-351.93)
NetT7_1: T7.1 U1.42 | length 390.9
  Top Layer w6: v1(27.98,-765.06) T7.1 ; v1(48.98,-566.06) 74.98,-540.06 74.98,-433.06 65.1,-423.19 U1.42
  Signal Layer 1 w6: v1(27.98,-765.06) 48.98,-744.06 v1(48.98,-566.06)
NetT8_1: T8.1 U1.43 | length 379.8
  Top Layer w6: v1(72.98,-583.06) 86.98,-569.06 86.98,-428.09 80.85,-421.97 U1.43 ; v1(83.98,-765.06) T8.1
  Signal Layer 1 w6: v1(72.98,-583.06) 72.98,-754.06 v1(83.98,-765.06)
NetT9_1: T9.1 U1.44 | length 421.8
  Top Layer w6: U1.44 96.6,-420.74 98.98,-423.12 98.98,-536.98 126.98,-564.98 v1(126.98,-582.06)
  Signal Layer 1 w6: v1(126.98,-582.06) 126.98,-657.06 v1(233.98,-764.06)
NetT10_1: T10.1 U1.45 | length 460
  Top Layer w6: U1.45 112.35,-522.43 v1(144.98,-555.06)
  Signal Layer 1 w6: v1@145.82,-555.06 145.82,-658.94 223.95,-737.06 261.98,-737.06 v1(288.98,-764.06)
NetT11_1: T11.1 U1.40 | length 909
  Top Layer w6: U1.40 33.61,-430.71 31.98,-432.34 31.98,-501.06 49.98,-519.06 v1(49.98,-520.06)
  Signal Layer 1 w6: v1(49.98,-520.06) 139.98,-520.06 429.98,-810.06 665.98,-810.06 v1(696.98,-841.06)
NetT13_1: T13.1 U1.47 U3.1 | length 1335.1
  Top Layer w6: U1.47 143.84,-422.93 147.98,-427.06 155.7,-427.06 195.7,-467.06 v1(195.98,-467.06)
  Top Layer w8: U3.1 972.66,-436.38 989.98,-419.06 v1(992.98,-422.06)
  Signal Layer 1 w6: v1(195.98,-467.06) 202.82,-473.91 645.82,-473.91 859.98,-688.06 v1(859.98,-747.06)
  Signal Layer 1 w8: v1(859.98,-747.06) 979.98,-627.06 979.98,-563.06 1007.82,-535.22 1007.82,-512.84 992.98,-498 v1(992.98,-422.06)
NetT14_1: T14.1 U1.32 | length 1147.1
  Top Layer w6: v1(-77.02,-315.06) -66.65,-304.69 U1.32
  Signal Layer 1 w6: v1(-77.02,-315.06) -48.05,-315.06 355.95,-719.06 409.98,-719.06 477.98,-787.06 761.98,-787.06 v1(815.98,-841.06)
NetT15_1: T15.1 U1.31 | length 3351.5
  Top Layer w6: v1(-269.02,-337.06) -267.02,-335.06 -128.76,-335.06 -82.63,-288.94 U1.31 ; v1(1192.98,-827.06) T15.1
  Bottom Layer w6: v1(-269.02,-337.06) -287.02,-319.06 -287.02,-192.06 -283.84,-188.88 -283.84,-187.2 -272.8,-176.16 -271.12,-176.16 -62.96,32 1359.85,32 1509.98,-118.12 1509.98,-739.68 1437.59,-812.06 1365.98,-812.06 1318.98,-859.06 1224.98,-859.06 v1(1192.98,-827.06)
NetT16_1: T16.1 U1.30 | length 3067.8
  Top Layer w6: v1(-256.02,-299.06) -240.02,-315.06 -125.73,-315.06 -84.02,-273.36 -84.19,-273.19 U1.30 ; v1(1316.98,-827.06) T16.1
  Bottom Layer w6: v1(-256.02,-299.06) -264.87,-290.22 -264.87,-226.65 -18.21,20 1354.88,20 1497.98,-123.09 1497.98,-734.71 1432.62,-800.06 1343.98,-800.06 v1(1316.98,-827.06)
NetT17_1: T17.1 U1.29 | length 2971.4
  Top Layer w6: v1(-246.02,-269.06) -244.02,-269.06 -216.02,-297.06 -126.61,-297.06 -86.99,-257.44 U1.29 ; v1(1246.98,-826.06) T17.1
  Bottom Layer w6: v1(-246.02,-269.06) -246.02,-237.76 -27.56,-19.29 1377.2,-19.29 1485.98,-128.06 1485.98,-665.06 1362.98,-788.06 1284.98,-788.06 v1(1246.98,-826.06)
NetT18_1: T18.1 U1.15 | length 1853.8
  Top Layer w8: U1.15 v1(128.09,-73.18) ; v1(1064.98,-313.06) 1095,-283.04 v1(1095,-230) ; v1(1137.98,-827.06) T18.1
  Signal Layer 1 w8: v1(128.09,-73.18) 128.09,-54.94 159.98,-23.06 954.98,-23.06 1064.98,-133.06 1095,-163.09 v1(1095,-230) ; v1(1064.98,-313.06) 1064.98,-754.06 v1(1137.98,-827.06)
NetU3_5: U3.5 Y4.2 | length 47.5
  Top Layer w10: Y4.2 U3.5
pads on no net: B1.6 B2.6 U1.3 U1.6 U1.8 U1.9 U1.12 U1.16 U1.18 U1.33 U1.34 U2.4 U5.4

## Polygon pours and split planes (outlines as drawn)
GND on Top Layer "Bottom Layer-No Net" (solid, remove dead copper, pour order 4): -357.02,53.94 1252.98,53.94 1252.98,-696.06 -357.02,-696.06
GND on Bottom Layer "Bottom Layer-No Net" (solid, remove dead copper, pour order 6): -357.02,-911.06 1611.48,-911.06 1611.48,53.94 -357.02,53.94
GND on Signal Layer 1 "Bottom Layer-No Net" (solid, remove dead copper, pour order 5): -357.02,-335 -70,-335 -56.06,-335 520,-911.06 -357.02,-911.06
GND on Internal Plane 1 (split plane): 1591.38,-890.97 -336.93,-890.97 -336.93,33.84 1591.38,33.84

## Keep-outs
Keep-Out Layer:
  the board outline again, w19.68

## Other copper
Top Layer:
  pour cut-out: -287.02,-21.06 1197.98,-21.06 1197.98,-646.06 -287.02,-646.06
  pour cut-out: 456.98,-647.06 553.98,-647.06 553.98,-716.06 554.98,-717.06 437.98,-717.06 437.98,-647.06 436.98,-646.06
  pour cut-out: 1423.98,-389.06 1423.98,-507.06 1196.98,-507.06 1197.98,-506.06 1197.98,-389.06

## Silkscreen, mask and mechanical layers (free items; w line width, h text height)
Top Overlay:
  text "-" at -302.02,-730.06 h25
  text "+" at -251.02,-730.06 h25
  text "-" at -111.02,-732.06 h25
  text "+" at -62.02,-732.06 h25
  text "+" at 70.98,-733.06 h25
  text "-" at 226.98,-733.06 h25
  text "-" at 18.98,-734.06 h25
  text "+" at 279.98,-735.06 h25
  text "RX" at -207.02,-851.06 h40
  text "TX" at 122.98,-851.06 h40
  text "Q" at -285.02,-874.06 h39.37
  text "I" at -88.02,-874.06 h39.37
  text "I" at 47.98,-874.06 h39.37
  text "Q" at 251.98,-874.06 h39.37
Top Solder:
  lines w39.37: 420.98,-671.06 -322.02,-671.06 -322.02,8.94 1232.98,8.94 1232.98,-372.06 ; 570.98,-671.06 1232.98,-671.06 1232.98,-525.06
Bottom Solder:
  rectangle: 547.98,-256.06 1072.98,-35
  rectangle: -12.02,-364.06 155.98,-198.06
  rectangle: 910,-525 995,-440